# EAGLE board Smart Garden (EAGLE 9.5.1)
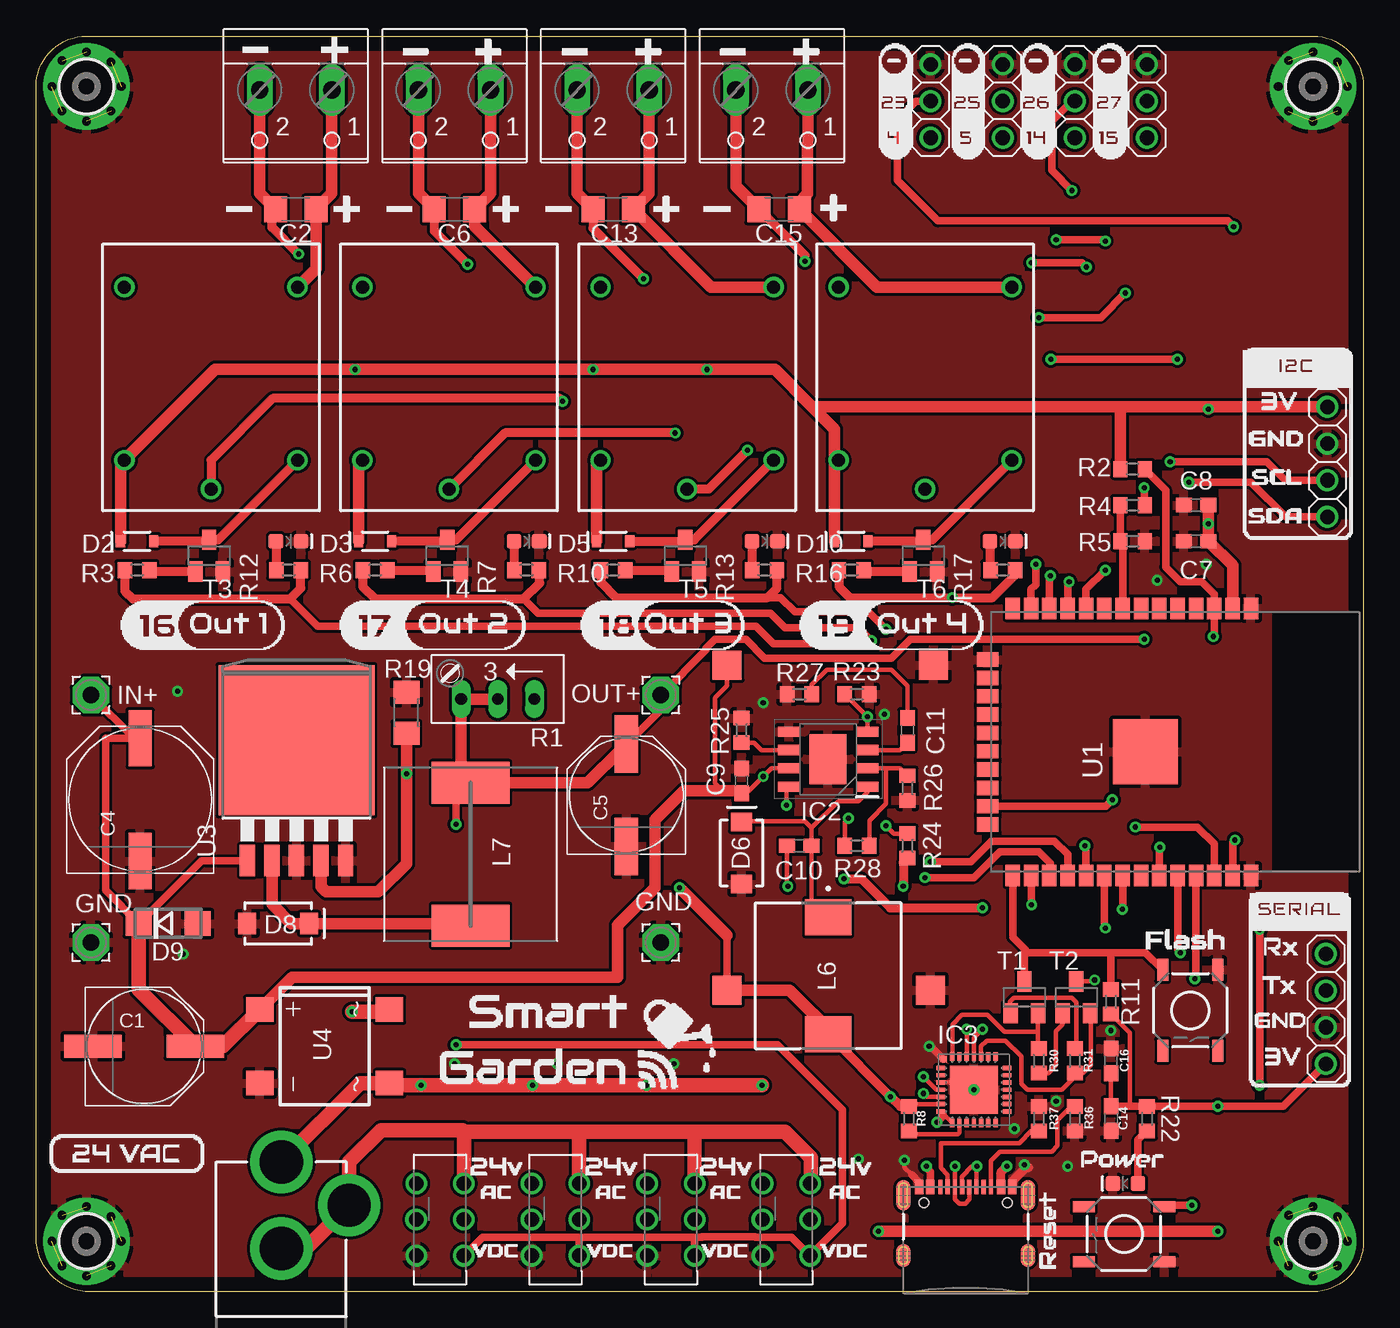
[diagram p0: board, top side]
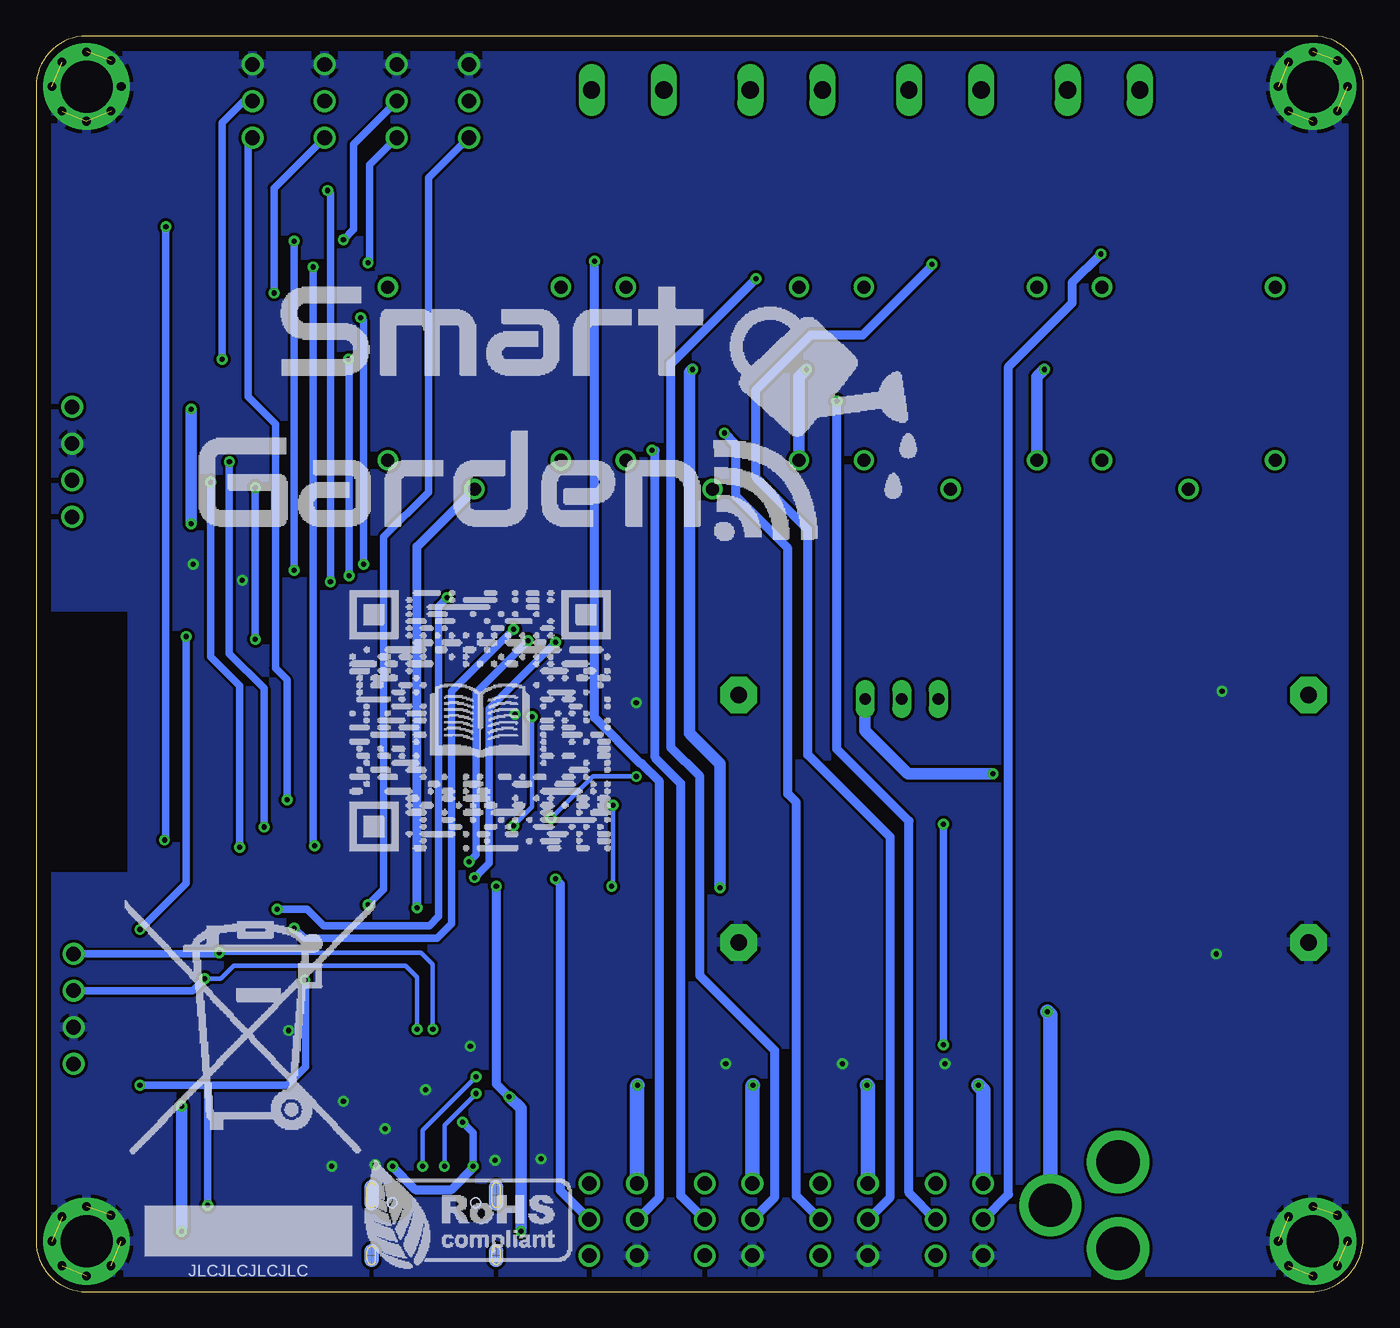
[diagram p1: board, bottom side, seen from below]

Size 92 x 87 mm. Coordinates in mm from the lower left corner, seen from the top.
Copper layers (1*16): Top 0.035mm / dielectric 1.5mm / Bottom 0.035mm
Design rules "PCBway": minimum track width 6mil, minimum drill 0.3mm, track to track 0.205mm, track to pad 0.205mm, pad to pad 0.205mm, via to via 0.205mm, smd to smd 8mil, copper to edge 40mil, drill to drill 8mil, minimum pad ring 10mil, minimum via ring 8mil, stop-mask expansion 4mil, vias tented up to drill 25mil, thermal gap 10mil

## Footprints (pad centres in the part's own frame; a part is rotated, then mirrored left to right if it is on the bottom)
PANASONIC_F = smd 4 x 1.6: + 3.55,0; - -3.55,0
C1206 = smd 1.6 x 1.8: 1 -1.4,0; 2 1.4,0
PANASONIC_G = smd 3.9 x 1.6: + 4.25,0; - -4.25,0
C0603 = smd 1.1 x 1: 1 -0.85,0; 2 0.85,0
SOD-323 = smd 0.63 x 0.83: A 1.15,0; C -1.15,0
SMA-DIODE = smd 1.27 x 1.47: A -2.15,0; C 2.15,0
DO214AC = smd 1.8 x 1.7: A 2.05,0; C -2.05,0
92X87 = drill 3.6 pad 6: B3,1 3.5,83.5; B3,2 88.5,83.5; B3,3 88.5,3.5; B3,6 3.5,3.5 | drill 0.6 pad 0.61: P$1 3.5,5.9; P$2 1.1,3.5; P$3 3.5,1.1; P$4 5.9,3.5; P$5 1.8,5.3; P$6 5.2,5.2; P$7 5.2,1.8; P$8 1.8,1.8; P$9 3.5,85.9; P$10 1.1,83.5; P$11 3.5,81.1; P$12 5.9,83.5; P$13 1.8,85.3; P$14 5.2,85.2; P$15 5.2,81.8; P$16 1.8,81.8; P$17 88.5,85.9; P$18 86.1,83.5; P$19 88.5,81.1; P$20 90.9,83.5; P$21 86.8,85.3; P$22 90.2,85.2; P$23 90.2,81.8; P$24 86.8,81.8; P$25 88.5,5.9; P$26 86.1,3.5; P$27 88.5,1.1; P$28 90.9,3.5; P$29 86.8,5.3; P$30 90.2,5.2; P$31 90.2,1.8; P$32 86.8,1.8
SOIC127P600X170-9N = smd 1.525 x 0.7: 1 -2.712,1.905; 2 -2.712,0.635; 3 -2.712,-0.635; 4 -2.712,-1.905; 5 2.712,-1.905; 6 2.712,-0.635; 7 2.712,0.635; 8 2.712,1.905 | smd 2.56 x 3.45: 9 0,0
MLP28 = smd 0.6 x 0.3: 1 -2.3,1.5; 2 -2.3,1; 3 -2.3,0.5; 4 -2.3,0; 5 -2.3,-0.5; 6 -2.3,-1; 7 -2.3,-1.5; 15 2.3,-1.5; 16 2.3,-1; 17 2.3,-0.5; 18 2.3,0; 19 2.3,0.5; 20 2.3,1; 21 2.3,1.5 | smd 0.3 x 0.6: 8 -1.5,-2.3; 9 -1,-2.3; 10 -0.5,-2.3; 11 0,-2.3; 12 0.5,-2.3; 13 1,-2.3; 14 1.5,-2.3; 22 1.5,2.3; 23 1,2.3; 24 0.5,2.3; 25 0,2.3; 26 -0.5,2.3; 27 -1,2.3; 28 -1.5,2.3 | smd 3.3 x 3.3: EXP 0,0 | smd 0.435 x 0.435: M -2.103,2.103
USB-C-16P-4LAYER-ISOLATED = smd 0.3 x 1: A5 -1.25,-0.34; A6 -0.25,-0.34; A7 0.25,-0.34; A8 1.25,-0.34; B5 1.75,-0.34; B6 0.75,-0.34; B7 -0.75,-0.34; B8 -1.75,-0.34 | smd 0.6 x 1: GND -3.225,-0.34; GND2 3.225,-0.34; VBUS1 -2.45,-0.34; VBUS2 2.45,-0.34 | smd 1 x 2.1: SHLD1 -4.32,-0.915; SHLD2 4.32,-0.915 | smd 1 x 2.1 bottom: SHLD3 -4.32,-0.915; SHLD4 4.32,-0.915 | smd 1 x 1.6: SHLD5 -4.32,-5.095; SHLD8 4.32,-5.095 | smd 1 x 1.6 bottom: SHLD6 -4.32,-5.095; SHLD7 4.32,-5.095 | hole 0.65: -2.89,-1.445; 2.89,-1.445
POWER_JACK_PTH = drill 2.997 pad 4.318: GND 0,7.7; GNDBREAK 4.7,10.7; PWR 0,13.7
1X04 = drill 1.016: 1 -3.81,0; 2 -1.27,0; 3 1.27,0; 4 3.81,0
1X03 = drill 1.016: 1 -2.54,0; 2 0,0; 3 2.54,0
LED-0603 = smd 1 x 1: A -0.877,0; C 0.877,0
SLF10145 = smd 2.5 x 3.2: 1 -4.05,0; 2 4.05,0
WE-PD_1260/1245/1280/1210 = smd 2.9 x 5.4: 1 -4.95,0; 2 4.95,0
2,54/1,1 = drill 1.118 pad 2.54 octagon: 1 0,0
RJ9W = drill 0.813 long: A 2.54,0.635; E -2.54,0.635; S 0,0.635
R0603 = smd 1 x 1.1: 1 -0.85,0; 2 0.85,0
R1206 = smd 1.6 x 1.803: 1 -1.422,0; 2 1.422,0
SRD-05VDC-SL-C = drill 0.9: COIL0 -5.39,-6.12; COIL1 -5.39,5.88; SWCLOSED 6.61,-6.12; SWCOMMON -7.39,-0.12; SWOPEN 6.61,5.88
TACTILE_SWITCH_SMD_5.2MM = smd 1.524 x 0.762: 1 -2.794,1.905; 2 2.794,1.905; 3 -2.794,-1.905; 4 2.794,-1.905
DPDT_JS202011CQN = drill 1: 1 -2.5,-1.65; 2 0,-1.651; 3 2.5,-1.65; 4 -2.5,1.65; 5 0,1.651; 6 2.5,1.65
SOT23-BEC = smd 1 x 1.4: B -0.95,-1.1; C 0,1.1; E 0.95,-1.1
SOT23 = smd 1 x 1.4: 1 -0.95,-1.1; 2 0.95,-1.1; 3 0,1.1
TP20SQ = smd 2 x 2: TP 0,0
ESP-32S = smd 1.5 x 1: 1 -9.25,7; 2 -9.25,5.73; 3 -9.25,4.46; 4 -9.25,3.19; 5 -9.25,1.92; 6 -9.25,0.65; 7 -9.25,-0.62; 8 -9.25,-1.89; 9 -9.25,-3.16; 10 -9.25,-4.43; 11 -9.25,-5.7; 12 -9.25,-6.97; 13 -9.25,-8.24; 14 -9.25,-9.51; 25 9.25,-9.51; 26 9.25,-8.24; 27 9.25,-6.97; 28 9.25,-5.7; 29 9.25,-4.43; 30 9.25,-3.16; 31 9.25,-1.89; 32 9.25,-0.62; 33 9.25,0.65; 34 9.25,1.92; 35 9.25,3.19; 36 9.25,4.46; 37 9.25,5.73; 38 9.25,7 | smd 1 x 1.5: 15 -5.7,-11.25; 16 -4.43,-11.25; 17 -3.16,-11.25; 18 -1.89,-11.25; 19 -0.62,-11.25; 20 0.65,-11.25; 21 1.92,-11.25; 22 3.19,-11.25; 23 4.46,-11.25; 24 5.73,-11.25 | smd 4.5 x 4.5: GND 0.68,-0.33
TO263-5 = smd 1.067 x 2.159: 1 -3.404,-5.791; 2 -1.702,-5.791; 3 0,-5.791; 4 1.702,-5.791; 5 3.404,-5.791 | smd 10.8 x 10.41: 6 0,2.54
DBS = smd 1.7 x 1.9: + -2.55,-4.5; - 2.55,-4.5; AC1 -2.55,4.5; AC2 2.55,4.5
W237-102 = drill 1.194 long: 1 -2.5,-1.27; 2 2.5,-1.27

## Placement (x,y rotation side)
C1  220µ/35V Low ESR  [PANASONIC_F]  7.5,17 0 top
C2  4.7uF  [C1206]  18,75 180 top
C4  330µ/50V  [PANASONIC_G]  7.21,34.09 90 top
C5  220µ/35V Low ESR  [PANASONIC_F]  40.91,34.4 90 top
C6  4.7uF  [C1206]  29,75 180 top
C7  100nF  [C0603]  80.4,52 180 top
C8  22uF  [C0603]  80.4,54.5 180 top
C9  10uF  [C0603]  48.9,35.4 90 top
C10  100nF  [C0603]  52.9,30.9 0 top
C11  220pF  [C0603]  60.4,38.9 90 top
C13  4.7uF  [C1206]  40,75 180 top
C14  0.1uF  [C0603]  74.5,12 270 top
C15  4.7uF  [C1206]  51.5,75 180 top
C16  4.7uF  [C0603]  74.5,16 90 top
D2  1N4148WS  [SOD-323]  7,52 0 top
D3  1N4148WS  [SOD-323]  23.5,52 0 top
D5  1N4148WS  [SOD-323]  40,52 0 top
D6  3A/40V/500mV  [SMA-DIODE]  48.9,30.4 90 top
D8  3A/40V/500mV  [SMA-DIODE]  16.78,25.51 0 top
D9  US1M  [DO214AC]  9.16,25.51 0 top
D10  1N4148WS  [SOD-323]  56.5,52 0 top
H1  92X84  [92X87]  0,0 0 top
IC2  MP1584EN-LF-Z  [SOIC127P600X170-9N]  54.9,36.9 180 top
IC3  CP2102  [MLP28]  65,14 0 top
J1  USB-C  [USB-C-16P-4LAYER-ISOLATED]  64.43,7.6 0 top
J2  POWER_JACK  [POWER_JACK_PTH]  17,-4.71 0 top
JP1  Serial  [1X04]  89.4,19.6 270 top
JP2  [1X03]  77,82.5 270 top
JP3  [1X03]  72,82.5 270 top
JP4  [1X03]  67,82.5 270 top
JP5  [1X03]  62,82.5 270 top
JP6  I2C  [1X04]  89.5,57.5 90 top
L2  BLUE  [LED-0603]  17.5,52 0 top
L3  BLUE  [LED-0603]  34,52 0 top
L5  BLUE  [LED-0603]  50.5,52 0 top
L6  SLF10145T-100M2R5-H  [SLF10145]  54.9,21.9 270 top
L7  47µH  [WE-PD_1260/1245/1280/1210]  30.11,30.31 90 top
L9  BLUE  [LED-0603]  67,52 0 top
LED2  GREEN  [LED-0603]  75.5,7.5 180 top
PAD1  [2,54/1,1]  3.8,41.34 0 top
PAD2  [2,54/1,1]  3.8,24.2 0 top
PAD3  [2,54/1,1]  43.3,41.34 0 top
PAD4  [2,54/1,1]  43.3,24.2 0 top
R1  [RJ9W]  32,41.7 180 top
R2  10K  [R0603]  76,57 180 top
R3  1.5k  [R0603]  7,50 180 top
R4  10k  [R0603]  76,54.5 0 top
R5  1.2k  [R0603]  76,52 180 top
R6  1.5k  [R0603]  23.5,50 180 top
R7  330  [R0603]  34,50 0 top
R8  10k  [R0603]  60.5,12 270 top
R10  1.5k  [R0603]  40,50 180 top
R11  10k  [R0603]  74.5,20.1 90 top
R12  330  [R0603]  17.5,50 0 top
R13  330  [R0603]  50.5,50 0 top
R16  1.5k  [R0603]  56.5,50 180 top
R17  330  [R0603]  67,50 0 top
R19  470R  [R1206]  25.67,40.12 270 top
R22  470  [R0603]  77,12 90 top
R23  39k  [R0603]  56.9,41.4 0 top
R24  120k  [R0603]  60.4,30.9 270 top
R25  200k  [R0603]  48.9,38.9 90 top
R26  24k  [R0603]  60.4,34.9 270 top
R27  68k  [R0603]  52.9,41.4 180 top
R28  100k  [R0603]  56.9,30.9 0 top
R30  10k  [R0603]  69.5,16 270 top
R31  10k  [R0603]  72,16 90 top
R36  5.1k  [R0603]  72,12 90 top
R37  5.1k  [R0603]  69.5,12 270 top
RL1  RELAYPTH  [SRD-05VDC-SL-C]  12,63 90 top
RL3  RELAYPTH  [SRD-05VDC-SL-C]  28.5,63 90 top
RL5  RELAYPTH  [SRD-05VDC-SL-C]  45,63 90 top
RL7  RELAYPTH  [SRD-05VDC-SL-C]  61.5,63 90 top
S1  Reset  [TACTILE_SWITCH_SMD_5.2MM]  80,19.5 270 top
S2  Reset  [TACTILE_SWITCH_SMD_5.2MM]  75.4,4 180 top
S4  JS202011CQN  [DPDT_JS202011CQN]  28,5 90 top
S5  JS202011CQN  [DPDT_JS202011CQN]  36,5 90 top
S7  JS202011CQN  [DPDT_JS202011CQN]  44,5 90 top
S9  JS202011CQN  [DPDT_JS202011CQN]  52,5 90 top
T1  MMBT3904  [SOT23-BEC]  68.5,20.4 0 top
T2  MMBT3904  [SOT23-BEC]  72.1,20.4 0 top
T3  MMBT2222A  [SOT23]  12,51 0 top
T4  MMBT2222A  [SOT23]  28.5,51 0 top
T5  MMBT2222A  [SOT23]  45,51 0 top
T6  MMBT2222A  [SOT23]  61.5,51 0 top
TP1  TPTP20SQ  [TP20SQ]  47.9,43.4 270 top
TP2  TPTP20SQ  [TP20SQ]  62.2,43.4 270 top
TP3  TPTP20SQ  [TP20SQ]  47.9,20.9 270 top
TP4  TPTP20SQ  [TP20SQ]  62,20.9 270 top
U1  ESP-32S  [ESP-32S]  77.2,38.1 270 top
U3  LM2596S  [TO263-5]  18.05,35.67 0 top
U4  DB107S  [DBS]  20,17 270 top
X2  [W237-102]  29,82 180 top
X4  [W237-102]  40,82 180 top
X6  [W237-102]  51,82 180 top
X7  [W237-102]  18,82 180 top

## Library data of the parts
C1 C5 = rcl; MF: Panasonic; MFN: EINTRAGEN!; SPICEPREFIX: C
C2 C6 C13 C15 = rcl; LCSC: C29823; SPICEPREFIX: C
C4 = rcl; MF: Panasonic; MFN: EEVFK1H221P; SPICEPREFIX: C
C7-C11 C14 C16 = rcl; SPICEPREFIX: C
D2 D3 D5 D10 = SparkFun-DiscreteSemi; PROD_ID: DIO-09646; VALUE: 250mA/100V
D6 D8 = SparkFun-DiscreteSemi; PROD_ID: DIO-09886
D9 = diode; MF: multicomp; MFN: RS1G; OC_FARNELL: 4085035
H1 = SpaceDIY_symbols
IC2 = SamacSys_Parts; DESCRIPTION: Switching Voltage Regulators 3A 1.5MHz 28V Nonsync Buck; HEIGHT: 1.7mm; MANUFACTURER_NAME: Monolithic Power Systems (MPS); MANUFACTURER_PART_NUMBER: MP1584EN-LF-Z; MOUSER_PART_NUMBER: 946-MP1584ENLFZ; MOUSER_PRICE-STOCK: https://www.mouser.co.uk/ProductDetail/Monolithic-Power-Systems-MPS/MP1584EN-LF-Z?qs=rC7bBWoQAAktQUA%2FYI26vA%3D%3D
IC3 = silabs; MF: FARNELL; MPN: CP2102-GM; OC_FARNELL: 9282130; OC_NEWARK: 30K5635
J1 = SparkFun-Connectors; PROD_ID: CONN-14122; VALUE: USB Female Type C Connector
J2 = SparkFun-Connectors; PROD_ID: CONN-08197
JP1 JP6 = SpaceDIY_connectors
JP2-JP5 = adafruit
L2 L3 L5 L9 = SparkFun-LED; PROD_ID: DIO-08575
L6 = SamacSys_Parts; DESCRIPTION: Inductors for power circuits, Wound ferrite, Automotive; HEIGHT: mm; MANUFACTURER_NAME: TDK; MANUFACTURER_PART_NUMBER: SLF10145T-100M2R5-H; MOUSER_PART_NUMBER: 810-SLF10145T100M2R5; MOUSER_PRICE-STOCK: https://www.mouser.co.uk/ProductDetail/TDK/SLF10145T-100M2R5-H?qs=Ydpp5fRLlSHtCO7lbZYIxA%3D%3D
L7 = Wurth_Elektronik_Passive_rev15b; MF: Wuerth
LED2 = SparkFun-LED; LCSC: C72043; PROD_ID: DIO-00821
PAD1-PAD4 = wirepad
R1 = pot
R2 R4 R11 = rcl; LCSC: C25804; SPICEPREFIX: R
R3 R6 R10 R16 = rcl; LCSC: C22843; SPICEPREFIX: R
R5 R7 R8 R12 R13 R17 R19 R22-R28 R30 R31 R36 R37 = rcl; SPICEPREFIX: R
RL1 RL3 RL5 RL7 = SpaceDIY_actuators
S1 S2 = SpaceDIY_electromechanical; LCSC: C318884; PROD_ID: SWCH-14139
S4 S5 S7 S9 = bt_electromech
T1 T2 = transistor-neu-to92
T3-T6 = transistor; LCSC: C8512
TP1-TP4 = testpad
U1 = esp32
U3 = national-semiconductor; MF: NATIONAL SEMICONDUCTOR; MPN: LM2596S-ADJ/NOPB; OC_FARNELL: 9494367; OC_NEWARK: 41K3842
U4 = rectifier; LCSC: C5377
X2 X4 X6 X7 = con-wago-500; MPN: 237-102; OC_FARNELL: unknown; OC_NEWARK: 70K9898

## Nets
3.3V: C7.1 C8.1 C14.1 C16.1 D2.C D3.C D5.C D10.C IC3.6 JP1.4 JP6.4 L6.2 R2.2 R8.1 R11.1 R22.2 R24.2 RL1.COIL1 RL3.COIL1 RL5.COIL1 RL7.COIL1 TP3.TP U1.2
24V: C1.+ C4.+ C9.1 D9.C IC2.7 PAD1.1 R28.1 TP1.TP U3.1 U4.+
24V1: J2.GND J2.GNDBREAK S4.3 S5.3 S7.3 S9.3 U4.AC1
24V2: J2.PWR S4.6 S5.6 S7.6 S9.6 U4.AC2
CC3: J1.B5 R36.2
CC4: J1.A5 R37.2
CLK: U1.20
CMD: U1.19
D+: IC3.4 J1.A6 J1.B6
D-: IC3.5 J1.A7 J1.B7
DTR: IC3.28 R30.1 T1.E
ESP_RST: R2.1 S2.3 T2.C U1.3
GND: C1.- C4.- C5.- C7.2 C8.2 C9.2 C14.2 C16.2 D6.A D8.A D9.A H1.B3,1 H1.B3,2 H1.B3,3 H1.B3,6 H1.P$1 H1.P$2 H1.P$3 H1.P$4 H1.P$5 H1.P$6 H1.P$7 H1.P$8 H1.P$9 H1.P$10 H1.P$11 H1.P$12 H1.P$13 H1.P$14 H1.P$15 H1.P$16 H1.P$17 H1.P$18 H1.P$19 H1.P$20 H1.P$21 H1.P$22 H1.P$23 H1.P$24 H1.P$25 H1.P$26 H1.P$27 H1.P$28 H1.P$29 H1.P$30 H1.P$31 H1.P$32 IC2.5 IC2.9 IC3.3 IC3.EXP IC3.M J1.GND J1.GND2 JP1.3 JP2.1 JP3.1 JP4.1 JP5.1 JP6.3 L2.C L3.C L5.C L9.C LED2.C PAD2.1 PAD4.1 R5.1 R19.1 R23.2 R25.2 R26.2 R27.2 R36.1 R37.1 S1.1 S2.1 S4.4 S5.4 S7.4 S9.4 T3.2 T4.2 T5.2 T6.2 TP2.TP TP4.TP U1.1 U1.15 U1.38 U1.GND U3.3 U3.5 U4.-
IO0: R11.2 S1.3 T1.C U1.25
IO2: U1.24
IO4: JP5.3 U1.26
IO5: JP4.3 U1.29
IO12: U1.14
IO13: U1.16
IO14: JP3.3 U1.13
IO15: JP2.3 U1.23
IO16: R3.2 R12.2 U1.27
IO17: R6.2 R7.2 U1.28
IO18: R10.2 R13.2 U1.30
IO19: R16.2 R17.2 U1.31
IO23: JP5.2 U1.37
IO25: JP4.2 U1.10
IO26: JP3.2 U1.11
IO27: JP2.2 U1.12
IO32: R4.1 R5.2 U1.8
IO33: U1.9
IO34: U1.6
IO35: U1.7
N$1: RL1.SWCOMMON S4.2
N$2: C2.2 S4.5 X7.2
N$3: C2.1 RL1.SWCLOSED X7.1
N$4: IC3.9 R8.2
N$7: D2.A RL1.COIL0 T3.3
N$9: R3.1 T3.1
N$12: D3.A RL3.COIL0 T4.3
N$13: R6.1 T4.1
N$14: D8.C L7.1 U3.2
N$15: L3.A R7.1
N$16: RL3.SWCOMMON S5.2
N$17: C6.2 S5.5 X2.2
N$18: R1.E R19.2 U3.4
N$19: C6.1 RL3.SWCLOSED X2.1
N$21: R30.2 T2.B
N$22: R31.2 T1.B
N$23: L2.A R12.1
N$27: D5.A RL5.COIL0 T5.3
N$28: R10.1 T5.1
N$29: L5.A R13.1
N$30: RL5.SWCOMMON S7.2
N$31: C13.2 S7.5 X4.2
N$32: C13.1 RL5.SWCLOSED X4.1
N$33: LED2.A R22.1
N$34: C10.1 IC2.8
N$35: C10.2 D6.C IC2.1 L6.1
N$36: IC2.4 R23.1 R24.1
N$37: C11.2 R27.1
N$38: C11.1 IC2.3
N$39: IC2.6 R25.1
N$40: IC2.2 R26.1 R28.2
N$47: D10.A RL7.COIL0 T6.3
N$48: R16.1 T6.1
N$49: L9.A R17.1
N$50: RL7.SWCOMMON S9.2
N$51: C15.2 S9.5 X6.2
N$52: C15.1 RL7.SWCLOSED X6.1
RTS: IC3.24 R31.1 T2.E
RX: IC3.26 JP1.1 U1.34
SCL: JP6.2 U1.36
SD0: U1.21
SD1: U1.22
SD2: U1.17
SD3: U1.18
SDA: JP6.1 U1.33
SVN: U1.5
SVP: U1.4
TX: IC3.25 JP1.2 U1.35
V_USB: IC3.7 IC3.8 J1.VBUS1 J1.VBUS2
VCC: C5.+ L7.2 PAD3.1 R1.A R1.S R4.2 S4.1 S5.1 S7.1 S9.1

## Tracks (layer width: path | path; a pad name or v marks a point on that pad's centre or on a via)
3.3V  (via drill 0.35)
  Top 0.305: 55.4,17.73 55.02,17.73 L6.2 | IC3.6 60.65,13 R8.1 | 75.8,12.85 C14.1 C16.1 | 75.8,12.85 R22.2 | R11.1 75.8,17.95 75.8,12.85
  Top 0.508: JP1.4 86.46,12.85 v81.9,12.85 C14.1 | TP3.TP 47.9,24.7
  Top 0.61: R8.1 59.9,12.85 v59.23,13.53 55.02,17.73 | R24.2 60.1,29.75 v60.1,28.1
  Top 0.813: TP3.TP 52.23,20.9 55.4,17.73 | D2.C 5.85,57.34 RL1.COIL1 12.41,63.9 v22.1,63.9 v38.6,63.9 v46.5,63.9 51.2,63.9 53.79,61.31 | D3.C 22.35,57.34 RL3.COIL1 | D5.C 38.85,57.34 RL5.COIL1 | D10.C 55.35,57.34 | 55.35,57.34 RL7.COIL1 | 53.79,61.31 55.35,59.75 55.35,57.34 | 47.9,24.7 v44.6,28 | C8.1 v81.25,53.2 C7.1 82.93,50.32 U1.2 | JP6.4 81.4,61.31 | 81.4,61.31 74.9,61.31 | 74.9,61.31 53.79,61.31 | 81.4,61.31 v81.25,61.16 | R2.2 75.15,61.06 74.9,61.31 | v58.4,4.2 v81.9,4.2
  Bottom 0.61: v60.1,28.1 60.1,14.4 v59.23,13.53
  Bottom 0.813: RL3.COIL1 22.62,63.38 v22.1,63.9 | RL5.COIL1 39.12,63.38 v38.6,63.9 | v44.6,28 44.6,36.6 46.7,38.7 46.7,63.7 v46.5,63.9 | v81.25,61.16 v81.25,53.2 | v59.23,13.53 58.4,12.7 v58.4,4.2 | v81.9,4.2 v81.9,12.85
24V  (via drill 0.35)
  Top 0.305: IC2.7 50.97,36.27 v50.4,35.7 49.25,34.55 49,34.55 C9.1 47.75,34.55 47.07,35.23 47.07,41.17 47.9,42 TP1.TP | R28.1 56.05,32.55 v56.3,32.8
  Top 0.508: U3.1 11.48,29.88 D9.C 4.81,27.81 4.81,38.34 C4.+ 6.8,38.34 PAD1.1
  Top 0.813: U4.+ 17.75,21.8 40.3,21.8 40.3,25.4 42.9,28 42.9,32.7 44.9,34.7 48.85,34.7 49,34.55
  Top 1.016: U4.+ 12.95,17 C1.+ 7.11,20.94 D9.C
  Bottom 0.305: v56.3,32.8 53.4,35.7 v50.4,35.7
24V1  (via drill 0.35)
  Top 1.016: S4.3 29.65,11.1 | J2.GND 18.7,2.99 J2.GNDBREAK 21.7,9 23.9,11.2 29.55,11.2 29.65,11.1 | 29.65,11.1 37.6,11.1 | 37.6,11.1 45.5,11.1 | 45.5,11.1 51.9,11.1 53.7,9.3 53.7,7.55 S9.3 | S7.3 45.65,10.95 45.5,11.1 | S5.3 37.65,11.05 37.6,11.1 | v21.9,19.4 24.35,19.4 U4.AC1
  Bottom 1.016: J2.GNDBREAK 21.7,19.2 v21.9,19.4
24V2  (via drill 0.35)
  Top 1.016: U4.AC2 23.7,14.45 | 23.7,14.45 22.46,14.45 J2.PWR | 23.7,14.45 23.85,14.3 v26.7,14.3 v34.4,14.3 v42.3,14.3 v50.3,14.3
  Bottom 1.016: S4.6 26.35,13.95 v26.7,14.3 | v50.3,14.3 50.35,14.25 S9.6 | S7.6 42.35,14.25 v42.3,14.3 | S5.6 34.35,14.25 v34.4,14.3
CC3
  Top 0.305: J1.B5 66.18,9.08 66.8,9.7 70.4,9.7 70.8,10.1 70.8,11.9 71.75,12.85 R36.2
CC4
  Top 0.305: J1.A5 63.18,8.12 62.7,8.6 62.7,10.3 68.15,10.3 69,11.15 R37.2
D+  (via drill 0.35)
  Top 0.305: IC3.4 62.4,14 v61.5,14.9 | J1.B6 65.18,8.68 | 65.18,8.68 v65.2,8.7 | J1.A6 64.18,7.98 64.88,8.68 65.18,8.68
  Bottom 0.305: v61.5,14.9 65.2,11.2 v65.2,8.7
D-  (via drill 0.35)
  Top 0.305: v63.7,8.7 63.68,8.68 J1.B7 63.68,6.42 64,6.1 64.4,6.1 64.7,6.4 64.68,6.42 J1.A7 | IC3.5 61.73,13.5 v61.49,13.74
  Bottom 0.305: v63.7,8.7 63.7,11.53 v61.49,13.74
DTR
  Top 0.305: IC3.28 63.5,18.5 64.18,19.18 65.92,19.18 67.1,18 69.4,18 69.45,18.05 | T1.E 69.45,18.05 | 69.45,18.05 69.45,16.9 R30.1
ESP_RST  (via drill 0.35)
  Top 0.305: T2.C 73.27,21.5 v73.37,21.6
  Top 0.508: v81.6,45.4 81.66,45.46 U1.3 81.66,48.34 80.8,49.2 79.3,49.2 78.3,50.2 78.3,55.55 R2.1 | v84.8,25.1 v84.8,14.3 | S2.3 78.29,6 v80.1,6
  Bottom 0.508: v81.6,45.4 81.6,28.3 v84.8,25.1 | v84.8,14.3 80.3,14.3 | 80.3,14.3 74.6,14.3 73.3,15.6 73.3,21.53 v73.37,21.6 | v80.1,6 80.1,14.1 80.3,14.3
GND  (via drill 0.35)  (16 unrouted)
  Top 0.305: IC3.3 64.1,14.5 64.6,14 IC3.EXP | 60.7,8.1 60.2,8.6 v60.2,9.1
  Top 0.508: J1.GND2 67.6,7.32 | J1.GND 61.2,7.59 60.7,8.1 | v61.9,17 62,17 IC3.M
  Top 0.61: J1.GND2 67.66,7.66 68.6,8.6 68.8,8.6
  other vias: 10.2,23.4 9.8,41.6 58.8,40 50.4,40.8 65,14 70.7,13.2 67.8,11.3 44.2,15.8 36.1,15.8 29,15.8 81.1,50.4 77.7,49.3 71.5,8.7 68.5,8.8 57,9.2 74.5,18.1
  pour Top: 0,83 arc-90 4,87 88,87 arc-90 92,83 92,4 arc-90 88,0 4,0 arc-90 0,4
  pour Bottom: 0,83 arc-90 4,87 88,87 arc-90 92,83 92,4 arc-90 88,0 4,0 arc-90 0,4
IO0
  Top 0.508: 74.5,23.5 68.75,23.5 68.5,23.75 | R11.2 74.5,23.2 74.5,23.5 | 68.5,23.75 67.69,24.56 U1.25 | T1.C 68.5,23.75 | S1.3 76.89,23.5 74.5,23.5
IO4  (via drill 0.35)
  Top 0.508: U1.26 69,28.81 v69,26.8
  Bottom 0.508: v69,26.8 67.9,27.9 67.9,52.3 64.8,55.4 64.8,77.19 62.03,79.96 JP5.3
IO5  (via drill 0.35)
  Top 0.508: U1.29 72.77,30.83 v72.7,30.9 | v69,71.3 72.5,71.3 v72.8,71
  Bottom 0.508: v72.8,71 72.8,31 v72.7,30.9 | v69,71.3 68.88,71.42 68.88,78.08 JP4.3
IO14  (via drill 0.35)
  Top 0.508: v75.5,69.2 73.8,67.5 v69.5,67.5 | U1.13 68.96,48.66 69.3,49 v69.3,50.4
  Bottom 0.508: v69.5,67.5 69.3,67.3 v69.3,50.4 | JP3.3 75.5,76.46 v75.5,69.2
IO15  (via drill 0.35)
  Top 0.508: v74.6,34.1 74.14,33.64 U1.23
  Bottom 0.508: v74.6,34.1 74.6,42.4 75.4,43.2 75.4,60.1 77.3,62 77.3,79.66 JP2.3
IO16  (via drill 0.35)
  Top 0.508: 17.6,48 19.5,46.1 49.9,46.1 51.1,44.9 55.9,44.9 v56,45 | v61.6,28.7 65,28.7 66.8,30.5 69.5,30.5 70.3,29.7 70.3,28.92 U1.27
  Top 0.61: R3.2 6.15,48.55 6.7,48 17.6,48 18.35,48.75 R12.2
  Bottom 0.508: v56,45 60.6,40.4 60.6,29.7 v61.6,28.7
IO17  (via drill 0.35)
  Top 0.508: 33.8,48 34.8,47 50.9,47 51.9,46 57,46 v57.9,45.1 | v62,29.8 64.8,29.8 66.21,31.21 70.59,31.21 71.5,30.3 U1.28
  Top 0.61: R6.2 22.65,48.85 23.5,48 33.8,48 34.9,49.1 34.9,49.95 R7.2
  Bottom 0.508: v57.9,45.1 61.51,41.49 61.51,30.29 v62,29.8
IO18  (via drill 0.35)
  Top 0.508: 50.7,48.1 51.6,48.1 52.6,47.1 57.7,47.1 v58.9,45.9 | v74.1,25.2 74.04,25.26 U1.30
  Top 0.61: R10.2 39.15,49.15 40.2,48.1 50.7,48.1 51.35,48.75 R13.2
  Bottom 0.508: v58.9,45.9 63.2,41.6 63.2,25.5 64.2,24.5 73.4,24.5 v74.1,25.2
IO19  (via drill 0.35)
  Top 0.508: U1.31 v75.31,26.51 v75.3,26.5
  Top 0.61: R16.2 55.65,48.85 56.4,48.1 v63.5,48.1 66.3,48.1 67.85,49.65 R17.2
  Bottom 0.508: v75.3,26.5 73.2,26.5 72.06,25.36 64.74,25.36 64.1,26 64.1,47.5 v63.5,48.1
IO23  (via drill 0.35)
  Top 0.508: v83,73.8 82.6,74.2 62.5,74.2 59.7,77 59.7,81.2 61,82.5 JP5.2 | v83.1,31.3 82.93,31.13 U1.37
  Bottom 0.508: v83,73.8 83,31.4 v83.1,31.3
IO25  (via drill 0.35)
  Top 0.508: v70.7,72.9 74,72.9 v74.1,72.8 | v74.1,50 72.77,48.67 U1.10
  Bottom 0.508: v74.1,72.8 v74.1,50 | v70.7,72.9 70,73.6 70,79.5 JP4.2
IO26  (via drill 0.35)
  Top 0.508: U1.11 71.5,49.1 v71.6,49.2 | v71.8,76.3 70.4,77.7 70.4,81.1 71.8,82.5 JP3.2
  Bottom 0.508: v71.6,49.2 71.6,76.1 v71.8,76.3
IO27  (via drill 0.35)
  Top 0.508: U1.12 70.23,49.53 v70.3,49.6 | v70.34,64.6 v79.1,64.6
  Bottom 0.508: v70.3,49.6 70.3,64.56 v70.34,64.6 | v79.1,64.6 79.1,81 77.6,82.5 JP2.2
IO32
  Top 0.508: U1.8 75.31,51.84 R5.2 R4.1
N$1  (via drill 0.35)
  Top 0.61: v36.5,61.7 36.3,61.9 16.4,61.9 12.12,57.62 RL1.SWCOMMON
  Bottom 0.61: S4.2 31.5,6.85 31.5,32.6 36.5,37.6 v36.5,61.7
N$2  (via drill 0.35)
  Top 0.61: v18.2,71.9 16.35,73.75 16.35,75.25
  Top 0.813: C2.2 16.35,75.25 15.5,76.1 X7.2
  Bottom 0.61: S4.5 24.6,6.75 24.6,64.1 20.2,68.5 20.2,69.9 v18.2,71.9
N$3
  Top 0.813: RL1.SWCLOSED 19.4,70.89 C2.1 20.5,76.1 X7.1
N$4
  Top 0.305: IC3.9 64,11 63.9,10.9 60.75,10.9 R8.2
N$7
  Top 0.61: RL1.COIL0 12.61,52.1 T3.3 11.9,52 D2.A
N$9
  Top 0.61: T3.1 7.95,49.9 R3.1
N$12
  Top 0.61: RL3.COIL0 29.11,52.1 T4.3 28.4,52 D3.A
N$13
  Top 0.61: R6.1 27.45,50 T4.1
N$14
  Top 0.813: L7.1 29.97,25.51 D8.C 17.69,25.51 16.35,26.85 U3.2
N$15
  Top 0.61: L3.A 33.12,50.03 R7.1
N$16  (via drill 0.35)
  Top 0.61: v44.3,59.5 32.51,59.5 RL3.SWCOMMON
  Bottom 0.61: S5.2 39.3,6.65 39.3,33.9 39.9,34.5 39.9,51.5 43.5,55.1 43.5,58.7 v44.3,59.5
N$17  (via drill 0.35)
  Top 0.61: C6.2 27.6,73.5 v29.9,71.2
  Top 0.813: C6.2 26.5,76.1 X2.2
  Bottom 0.61: S5.5 32.8,6.55 32.8,31.5 38.5,37.2 38.5,52.8 42.1,56.4 42.1,62.5 38.3,66.3 34.7,66.3 29.9,71.1 v29.9,71.2
N$18  (via drill 0.35)
  Top 0.813: U3.4 19.75,28.05 20.1,27.7 23.7,27.7 25.67,29.67 v25.67,35.9 R19.2
  Bottom 0.813: R1.E 34.54,38.87 31.57,35.9 v25.67,35.9
N$19
  Top 0.813: X2.1 31.5,76.1 C6.1 30.4,73.83 RL3.SWCLOSED
N$21
  Top 0.305: R30.2 70.15,15.15 70.7,15.7 70.7,18.05 71.15,18.5 T2.B
N$22
  Top 0.305: R31.2 72.1,16.95 72.1,18.55 72.11,18.55 72.11,20.05 71.8,20.36 67.76,20.36 67.5,20.1 67.5,19.35 T1.B
N$23
  Top 0.61: L2.A 16.65,51.97 R12.1
N$27
  Top 0.61: RL5.COIL0 45.61,52.1 T5.3 44.9,52 D5.A
N$28
  Top 0.61: R10.1 43.95,50 T5.1
N$29
  Top 0.61: R13.1 49.65,51.97 L5.A
N$30  (via drill 0.35)
  Top 0.61: v49.3,58.3 46.61,55.61 RL5.SWCOMMON
  Bottom 0.61: S7.2 47.3,6.65 47.3,35.2 49.1,37 49.1,58.3 v49.3,58.3
N$31  (via drill 0.35)
  Top 0.61: v42.1,70.2 38.6,73.7 C13.2
  Top 0.813: C13.2 37.5,76.1 X4.2
  Bottom 0.61: S7.5 40.8,6.55 40.8,16.7 46,21.9 46,35.7 48,37.7 48,64.3 v42.1,70.2
N$32
  Top 0.813: X4.1 42.5,76.1 C13.1 46.79,69.61 RL5.SWCLOSED
N$33
  Top 0.508: LED2.A 76.38,10.53 R22.1
N$34  (via drill 0.35)
  Top 0.305: C10.1 52.05,28.15 v52.1,28.1 | v52,33.7 52,34.81 IC2.8
  Bottom 0.305: v52.1,28.1 52,28.2 v52,33.7
N$35
  Top 0.305: L6.1 53.75,27.1 C10.2 53.75,32.15 | 53.75,32.15 53.3,32.6 48.95,32.6 D6.C | IC2.1 57.61,34.61 57,34 55.6,34 53.75,32.15
N$36  (via drill 0.35)
  Top 0.305: R23.1 v57.61,39.84 IC2.4 | R24.1 59.45,31.75 v58.9,32.3
  Bottom 0.305: v58.9,32.3 57.61,33.59 v57.61,39.84
N$37
  Top 0.305: R27.1 53.75,42.05 54.8,43.1 59.3,43.1 60.4,42 C11.2
N$38
  Top 0.305: C11.1 59.88,37.53 IC2.3
N$39
  Top 0.305: IC2.6 50.27,37.53 49.75,38.05 R25.1
N$40
  Top 0.305: IC2.2 58.9,36.27 | 58.9,36.27 59.88,36.27 R26.1 | R28.2 57.75,32.65 58.9,33.8 58.9,36.27
N$47
  Top 0.61: RL7.COIL0 62.11,52.1 T6.3 61.4,52 D10.A
N$48
  Top 0.61: T6.1 57.45,49.9 R16.1
N$49
  Top 0.61: R17.1 66.15,51.97 L9.A
N$50  (via drill 0.35)
  Top 0.61: v56,28.6 57.2,28.6 59.2,26.6 v65.6,26.6
  Bottom 0.61: S9.2 55.65,7 55.65,28.25 v56,28.6 | v65.6,26.6 65.6,51.63 RL7.SWCOMMON
N$51  (via drill 0.35)
  Top 0.61: v53.3,71.4 53.3,71.8 C15.2
  Top 0.813: C15.2 48.5,76.6 X6.2
  Bottom 0.61: S9.5 48.8,6.55 48.8,35.36 50.03,36.59 50.09,36.59 53.3,39.8 v53.3,71.4
N$52
  Top 0.813: X6.1 53.47,76.07 52.9,75.5 C15.1 58.29,69.61 RL7.SWCLOSED
RTS
  Top 0.305: IC3.24 65.5,17 65.9,17.4 67.2,17.4 68.3,16.3 68.3,14.4 68.7,14 71.1,14 72,14.9 R31.1 72.55,15.15 73.1,15.7 73.1,19.25 T2.E
RX  (via drill 0.35)
  Top 0.305: IC3.26 v64.5,18.2
  Top 0.508: v79.3,23.5 79.12,23.68 U1.34
  Bottom 0.305: v64.5,18.2 64.5,22.7 65.3,23.5 74.2,23.5 74.5,23.5 v79.3,23.5
  Bottom 0.508: JP1.1 79.39,23.41 v79.3,23.5
SCL  (via drill 0.35)
  Top 0.508: JP6.2 86.57,56.23 85.3,57.5 v78.6,57.5 | v76.2,32.2 80.5,32.2 81.66,31.04 U1.36
  Bottom 0.508: v78.6,57.5 78.6,44.2 76.2,41.8 v76.2,32.2
SDA  (via drill 0.35)
  Top 0.508: U1.33 77.85,30.75 v77.9,30.8 | v79.9,56.1 84.2,56.1 86.61,53.69 JP6.1
  Bottom 0.508: v77.9,30.8 77.9,42 79.9,44 v79.9,56.1
TX  (via drill 0.35)
  Top 0.305: IC3.25 65,17.6 v65.6,18.2
  Top 0.508: U1.35 80.39,21.79 v80.3,21.7
  Bottom 0.305: v65.6,18.2 65.6,21.8 66.4,22.6 78.3,22.6 79.2,21.7 v80.3,21.7
  Bottom 0.508: JP1.2 81.13,20.87 v80.3,21.7
V_USB  (via drill 0.35)
  Top 0.305: IC3.7 62.85,12.35 IC3.8
  Top 0.508: J1.VBUS1 61.98,8.32 61.7,8.6 v61.7,8.7 | v62.44,11.74 62.85,12.15 62.85,12.35
  Top 0.61: J1.VBUS2 66.88,8.28 v67.3,8.7
  Bottom 0.508: v61.7,8.7 61.7,11 v62.44,11.74
  Bottom 0.61: v67.3,8.7 67.3,8.67 65.72,7.08 63.22,7.08 61.7,8.6 v61.7,8.7
VCC  (via drill 0.35)
  Top 0.508: 40.53,37.57 43.3,40.34 PAD3.1 46.44,44.49 46.44,44.59 47.05,45.2 49.2,45.2 50.5,43.9 59.3,43.9 60.6,45.2 v76.8,45.2 | S4.1 30.94,3.79 37.5,3.79 | 37.5,3.79 45.7,3.79 | 45.7,3.79 46.15,3.79 46.17,3.8 49.83,3.8 49.85,3.79 52.36,3.79 S9.1 55.9,4.75 55.9,12.6 51.4,17.1 v29.1,17.1 | S7.1 45.65,3.74 45.7,3.79 | S5.1 37.65,3.64 37.5,3.79 | v29.1,32.4 29.1,34.25 L7.2 | R4.2 76.8,54.55 v76.8,55.7
  Top 0.813: C5.+ 40.53,37.57 38.23,35.27 L7.2 29.46,35.92 R1.A R1.S
  Bottom 0.508: v29.1,17.1 v29.1,32.4 | v76.8,55.7 v76.8,45.2

## Text on the board
tPlace: OUT+ | IN+ | GND | GND
bNames: JLCJLCJLCJLC